# EAGLE board MJ808 clone - all driver (EAGLE 9.0.0)
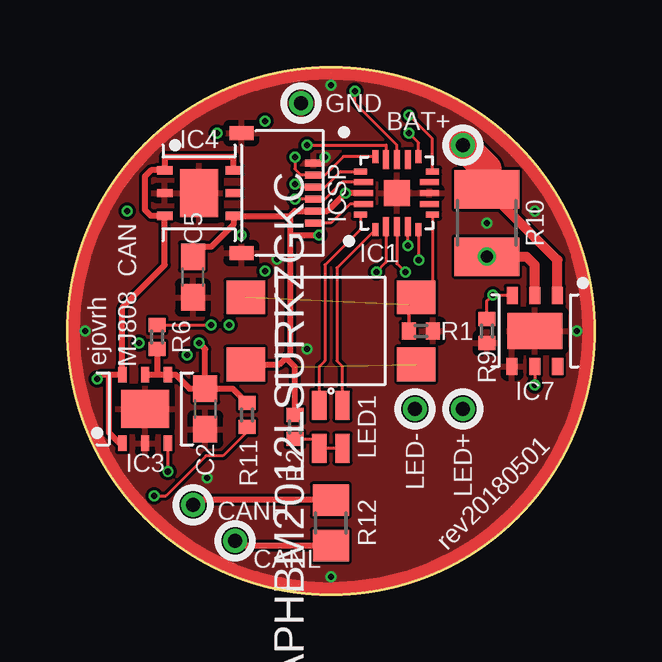
[diagram p0: board, top side]
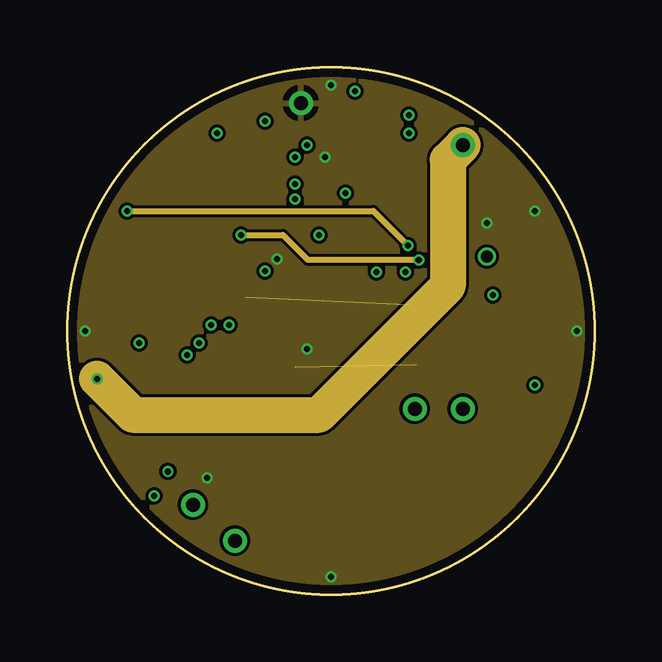
[diagram p1: board, inner layer Route2]
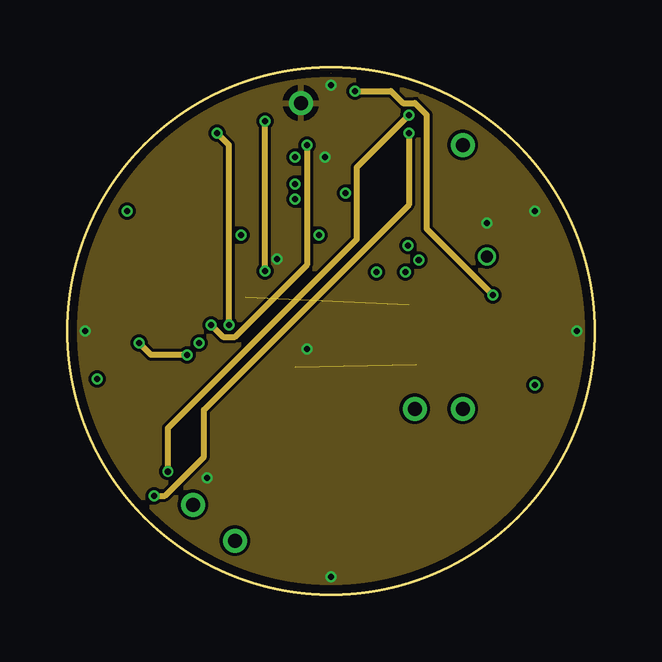
[diagram p2: board, inner layer Route15]
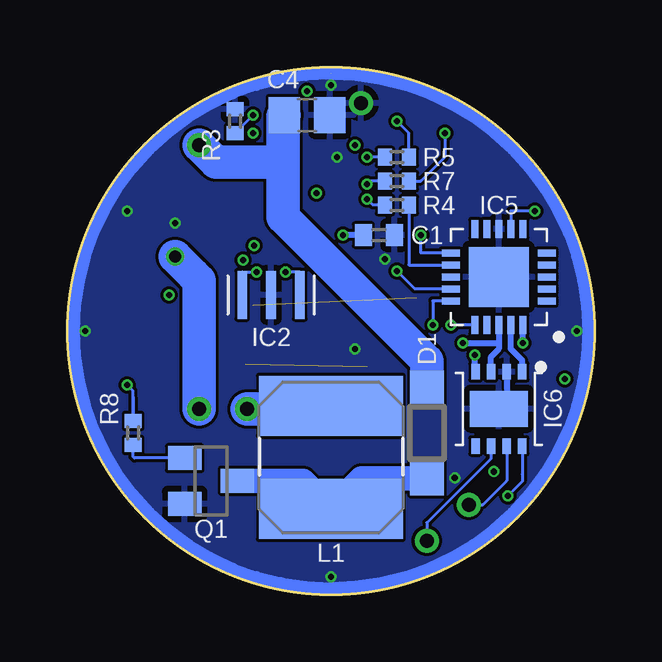
[diagram p3: board, bottom side, seen from below]

Size 22 x 22 mm. Coordinates in mm from the lower left corner, seen from the top.
Outline: circle at 11,11 radius 11
Copper layers (1*2*15*16): Top 0.035559375mm / dielectric 0.17018125mm / Route2 0.01778125mm / dielectric 47mil / Route15 0.01778125mm / dielectric 0.17018125mm / Bottom 0.035559375mm
Design rules "oshpark-4layer *": minimum track width 5mil, minimum drill 10mil, track to track 5mil, track to pad 5mil, pad to pad 5mil, via to via 5mil, smd to smd 5mil, copper to edge 15mil, drill to drill 6mil, minimum pad ring 4mil, minimum via ring 4mil, stop-mask expansion 2.5mil, vias tented up to drill 0mil, thermal gap 10mil
Net classes: 0 GND: width 0.254 mm, drill 0.254 mm, clearance 0.127 mm; 1 VCC: width 0.254 mm, drill 0.254 mm, clearance 0.127 mm; 2 signal: width 0.127 mm, drill 0.254 mm, clearance 0.127 mm
tRestrict: area 18,10.2 to 18.2,11.8
bRestrict: area 3,6.6 to 5,6.9

## Footprints (pad centres in the part's own frame; a part is rotated, then mirrored left to right if it is on the bottom)
TH = drill 0.6 pad 1.016: TP$1 0,0
C0402 = smd 0.7 x 0.9: 1 -0.65,0; 2 0.65,0
C0603 = smd 1.1 x 1: 1 -0.85,0; 2 0.85,0
C0805 = smd 1.3 x 1.5: 1 -0.95,0; 2 0.95,0
SOD123 = smd 1.4 x 1.4: A 1.9,0; C -1.9,0
VQFN-20 = smd 1.1 x 1.1: GND 0,0 | smd 0.25 x 0.8: GND1 0,-1.35; PA2 -0.45,1.4; PB7 0.45,1.4; PD5 -0.45,-1.35; PD6 0.45,-1.35; VCC 0,1.4 | smd 0.8 x 0.25: PA0 -1.4,0; PA1 -1.4,0.45; PB2 1.4,-0.45; PB3 1.4,0; PB4 1.4,0.45; PD2 -1.4,-0.45 | smd 0.25 x 0.55: PB0 0.9,-1.48; PB6 0.9,1.52; PD0 -0.9,1.52; PD4 -0.9,-1.48 | smd 0.55 x 0.25: PB1 1.52,-0.9; PB5 1.52,0.9; PD1 -1.52,0.9; PD3 -1.52,-0.9
SMT = smd 0.4 x 2: GND 0,0; XTAL1 -1.2,0; XTAL2 1.2,0
WSON6 = smd 0.35 x 0.65: 1-IN -0.95,-1.431; 2-GND 0,-1.431; 3-EN 0.95,-1.431; 4-OUT 0.954,1.431; 5-SNS 0,1.431; 6-IN -0.954,1.431 | smd 2 x 1.6: GND1 0,0
QFN20 = smd 0.3 x 0.75: !CS! 1,2; !RESET! 0.5,2; !RX0BF! 1,-2; !RX1BF! 0.5,-2; GND6 0,-2; OSC1 -0.5,-2; OSC2 -1,-2; RXCAN -1,2; TXCAN -0.5,2; VDD 0,2 | smd 0.75 x 0.3: !INT! 2,-1; !TX0RTS! -2,0.5; !TX1RTS! -2,0; !TX2RTS! -2,-1; CLKOUT -2,1; NC1 -2,-0.5; NC2 2,0; SCK 2,-0.5; SI 2,0.5; SO 2,1 | smd 2.5 x 2.5: GND 0,0
DFN10 = smd 0.35 x 0.65: CANH -0.325,1.55; CANL 0.325,1.55; RXD 0.975,-1.55; SPLIT 0.975,1.55; STBY -0.975,1.55; TXD -0.975,-1.55; VDD 0.325,-1.55; VSS -0.325,-1.55 | smd 2.4 x 1.5: GND 0,0
TDFN-6-EP = smd 0.71 x 0.46: CSN -1.48,0; DIM -1.48,-0.94; DRV 1.48,0; GND1 1.48,-0.95; IN -1.48,0.94; VCC 1.48,0.95 | smd 1.5 x 2.3: GND 0,0
SMT' = smd 0.3 x 0.7: 1 -1.25,1.27; 2 -0.75,1.27; 3 -0.25,1.27; 4 0.25,1.27; 5 0.75,1.27; 6 1.25,1.27 | smd 0.6 x 1: GND1 -2.5,-1.73; GND2 2.5,-1.73
SRN6045 = smd 2.5 x 6: 1 -2.175,0; 2 2.125,0
SMD = smd 1.2 x 0.6: 1 0.9,0.48; 2 -0.9,0.48; 3 -0.9,-0.48; 4 0.9,-0.48
SOT23 = smd 1 x 1.4: 1 -0.95,-1.1; 2 0.95,-1.1; 3 0,1.1
R0402 = smd 0.6 x 0.7: 1 -0.5,0; 2 0.5,0
R1210 = smd 1.6 x 2.7: 1 -1.4,0; 2 1.4,0
R0805 = smd 1.3 x 1.5: 1 -0.95,0; 2 0.95,0
SMD' = smd 1.6 x 1.4: 1 -3.556,-1.397; 2 3.556,-1.397; 3 -3.556,1.397; 4 3.556,1.397

## Placement (x,y rotation side)
BAT+  LiIon + Terminal  [TH]  16.5,18.75 0 top
C1  0.1μF  [C0402]  9,15 0 bottom
C2  22μF  [C0603]  5.75,7.75 270 top
C4  47μF / 15V+  [C0805]  12,20 0 bottom
C5  22μF  [C0603]  5.25,13.25 90 top
CANH  CAN high  [TH]  5.25,3.75 0 top
CANL  CAN low  [TH]  7,2.25 0 top
D1  PMEG2010ER,115  [SOD123]  7,6.75 270 bottom
GND  LiIon - Terminal  [TH]  9.75,20.5 0 top
IC1  ATTINY4313-MMH  [VQFN-20]  13.75,16.75 90 top
IC2  PRQV8.00CR1510Y00L  [SMT]  13.5,12.5 0 bottom
IC3  LP38693SD-5.0/NOPB  [WSON6]  3.25,7.75 0 top
IC4  LP38693SD-5.0/NOPB  [WSON6]  5.5,16.75 270 top
IC5  MCP2515  [QFN20]  4,13.25 180 bottom
IC6  MCP2561-2  [DFN10]  4,7.75 180 bottom
IC7  MAX16820  [TDFN-6-EP]  19.5,11 270 top
ICSP  5034800600  [SMT']  9,16.75 270 top
L1  VLS6045EX-150M-CA  [SRN6045]  11,5.75 90 bottom
LED1  APHBM2012LSURKZGKC  [SMD]  11,7 270 top
LED+  LED anode  [TH]  16.5,7.75 0 top
LED-  LED cathode  [TH]  14.5,7.75 0 top
Q1  PMV213SN,215  [SOT23]  16,4.75 270 bottom
R1  10k  [R0402]  14.75,11 0 top
R2  10k  [R0402]  9.5,7 90 top
R3  10k  [R0402]  15,19.75 270 bottom
R4  330  [R0402]  8.25,16.25 180 bottom
R5  330  [R0402]  8.25,18.25 180 bottom
R6  10k  [R0402]  3.75,10.75 90 top
R7  330  [R0402]  8.25,17.25 180 bottom
R8  10k  [R0402]  19.25,6.75 270 bottom
R9  10k  [R0402]  17.5,11 270 top
R10  0.15 / 1W  [R1210]  17.5,15.5 90 top
R11  10k  [R0402]  7.5,7.5 270 top
R12  120  [R0805]  11,3 90 top
SW1  TL3305-844809  [SMD']  11,11 0 top

## Library data of the parts
BAT+ CANH CANL GND LED+ LED- = signal testpoint
C1 C2 C4 C5 = rcl; SPICEPREFIX: C
D1 = diode
IC1 = ATtiny4313 microcontroller; SPICEPREFIX: X
IC2 = PRQV8.00CR1510Y00L - 8MHz resonator
IC3 IC4 = LP38693 5V LDO
IC5 = MCP2515-I-ML - Standalonce CAN Controller with SPI Interface
IC6 = MCP2561-2 - High-Speed CAN Transceiver
IC7 = MAX16820 LED Driver, constant current
ICSP = 5034800600 FPC Connector
L1 = SparkFun-Coils; PROD_ID: NDUC-11627
LED1 = APHBM2012LSURKZGKC
Q1 = adafruit
R1-R12 = rcl; SPICEPREFIX: R
SW1 = TL3305-844809 SPST-NO Tact Switch

## Nets
5V0_CAN: C2.1 IC3.4-OUT IC3.5-SNS IC5.VDD IC6.VDD R6.1 R11.1
5V0_μC [VCC]: C1.1 C5.2 IC1.VCC IC4.4-OUT ICSP.5 R2.2 SW1.1 SW1.2
BAT+: BAT+.TP$1 C4.1 D1.C IC3.1-IN IC3.6-IN IC4.1-IN IC4.3-EN IC4.6-IN IC7.IN R10.2
CANH [signal]: CANH.TP$1 IC6.CANH R12.2
CANL [signal]: CANL.TP$1 IC6.CANL R12.1
CLOCKOUT [signal]: IC1.PD2 IC5.OSC1
DEBUGWIRE/RESET [signal]: IC1.PA2 ICSP.6
DIM_BRAKE_DRAIN: D1.A L1.1 Q1.3
DIM_FRONT [signal]: IC1.PB3 IC7.DIM R9.1
DIM_FRONT_GATE [signal]: IC7.DRV R8.1
EN [signal]: IC1.PB0 IC3.3-EN R3.2
GATE [signal]: Q1.1 R8.2
GND: C1.2 C2.2 C4.2 C5.1 GND.TP$1 IC1.GND IC1.GND1 IC2.GND IC3.2-GND IC3.GND1 IC4.2-GND IC4.GND1 IC5.GND IC5.GND6 IC6.GND IC6.VSS IC7.GND IC7.GND1 ICSP.1 ICSP.GND1 ICSP.GND2 Q1.2 R1.2 R3.1 R9.2
GREEN_LED [signal]: IC1.PD0 LED1.3
ICSP_MISO [signal]: IC1.PB6 ICSP.3 R7.2
ICSP_MOSI [signal]: IC1.PB5 ICSP.2 R5.2
ICSP_SCK [signal]: IC1.PB7 ICSP.4 R4.2
INT [signal]: IC1.PD3 IC5.!INT!
LED [signal]: LED1.1 LED1.4 R2.1
LED_AN: IC7.CSN LED+.TP$1 R10.1
LED_CA: L1.2 LED-.TP$1
N$1: IC1.PD6
N$2: IC1.PD5
N$3: IC1.PB2
RED_LED [signal]: IC1.PD1 LED1.2
RXCAN: IC5.RXCAN IC6.RXD
SPI_MISO [signal]: IC5.SO R7.1
SPI_MOSI [signal]: IC5.SI R5.1
SPI_SCK [signal]: IC5.SCK R4.1
SPI_SS [signal]: IC1.PB4 IC5.!CS! R6.2
STBY [signal]: IC1.PB1 IC6.STBY R11.2
SWITCH [signal]: IC1.PD4 R1.1 SW1.3 SW1.4
TXCAN: IC5.TXCAN IC6.TXD
VCC: IC7.VCC
XTAL1 [signal]: IC1.PA0 IC2.XTAL1
XTAL2 [signal]: IC1.PA1 IC2.XTAL2

## Tracks (layer width: path | path; a pad name or v marks a point on that pad's centre or on a via)
5V0_CAN  (via drill 0.25)
  Top 0.254: IC3.5-SNS 3.75,9.18 | 3.75,9.18 IC3.4-OUT 4.52,9.18 5.1,8.6 C2.1 | v5.5,10.5 v5.5,10.49 5.75,10.24 C2.1 | R6.1 3.75,9.18 | 6.1,8.25 C2.1 | C2.1 6.9,8.6 R11.1
  Bottom 0.254: IC5.VDD 4,10.5 | 4,10.5 4,10.25 4.33,9.93 IC6.VDD | v5.5,10.5 4,10.5
5V0_μC  (via drill 0.25)  (1 unrouted)
  Top 0.254: IC1.VCC v11.6,16.75 10.85,16 ICSP.5 9.5,16 9.3,15.8 | 9.3,15.8 IC4.4-OUT 6.93,15.43 6,14.5 5.65,14.5 C5.2 | SW1.1 8.85,9.6 9.12,9.88 | 9.3,15.8 9.3,15 | 9.3,15 9.3,10.05 9.12,9.88 | 9.3,15 v10.5,15 | R2.2 9.5,9.5 9.12,9.88
  Bottom 0.254: C1.1 v10.5,15
BAT+  (via drill 0.25)
  Top 0.254: IC4.6-IN 6.93,18.25 4.07,18.25 IC4.1-IN 3.5,17.7 3.25,17.45 3.25,16.05 3.5,15.8 IC4.3-EN 4.07,13.75 2.3,11.98 IC3.6-IN | 1.75,9.18 1.75,6.75 2.18,6.32 IC3.1-IN | IC3.6-IN 2.18,9.18 | v1.25,9 1.43,9.18 1.75,9.18 | 1.75,9.18 IC3.6-IN
  Top 0.406: R10.2 20.44,13.96 IC7.IN
  Top 1.25: R10.2 17.5,17.75 BAT+.TP$1
  Route2 1.5: BAT+.TP$1 15.88,18.12 15.88,12.88 10.5,7.5 2.75,7.5 v1.25,9
  Bottom 1.4: BAT+.TP$1 15.8,18.05 14.25,18.05 13.2,18.05 13,18.25 | D1.C 7,9.75 13,15.75 13,18.25 | 13,18.25 13,19.95 C4.1
CANH
  Top 0.254: R12.2 5.45,3.95 CANH.TP$1
  Bottom 0.127: IC6.CANH 3.67,4.75 4.67,3.75 CANH.TP$1
CANL
  Top 0.254: 10.8,2.25 R12.1 7.2,2.05 CANL.TP$1
  Bottom 0.127: IC6.CANL 4.33,5.67 7,3 CANL.TP$1
CLOCKOUT  (via drill 0.25)
  Top 0.127: IC1.PD2 14.2,15.25 v14.2,14.56
  Route2 0.254: v14.2,14.56 12.76,16 v2.5,16
  Bottom 0.127: v2.5,16 3.5,16 IC5.OSC1
DEBUGWIRE/RESET
  Top 0.127: IC1.PA2 11.8,16.3 11,15.5 ICSP.6
DIM_BRAKE_DRAIN
  Bottom 1.016: 7.1,4.75 D1.A 9.72,4.85 L1.1 12.18,4.75 Q1.3
DIM_FRONT  (via drill 0.25)
  Top 0.127: 18.5,12.75 18.5,12.54 IC7.DIM 18.54,12.5 v17.75,12.5 17.5,12.25 R9.1 | IC1.PB3 13.75,18.75 12,20.5 v12,21
  Route15 0.254: v17.75,12.5 15,15.25 15,20 14.5,20.5 14,20.5 13.5,21 v12,21
DIM_FRONT_GATE  (via drill 0.25)
  Top 0.127: IC7.DRV v19.5,8.75
  Bottom 0.127: 19.25,8.25 R8.1 19.25,8.5 v19.5,8.75
EN  (via drill 0.25)
  Top 0.127: v4.2,5.13 IC3.3-EN | IC1.PB0 15.23,19.02 v14.25,20
  Route15 0.254: v4.2,5.13 4.2,6.95 12.07,14.82 12.07,17.82 v14.25,20
  Bottom 0.127: R3.2 v14.25,20
GATE
  Bottom 0.127: Q1.1 19.2,5.7 19.25,5.75 R8.2
GND  (via drill 0.25)  (1 unrouted)
  Top 0.127: v11,21.25 11,21.75 | v11,0.75 11,0.25
  Top 0.254: ICSP.1 10.5,18 v10.75,18.25
  Top 0.55: 11,21.75 arc-180 11,0.25 arc-180 11,21.75
  Bottom 0.254: IC6.GND 3.67,8.07 IC6.VSS
  Bottom 0.55: 11,21.75 arc180 11,0.25 arc180 11,21.75
  other vias: 8.75,14 0.75,11 10,10.25 5.84,4.88 19.5,16 17.5,15.5 21.25,11
  pour Top: -1,23 23,23 23,-1 -1,-1
  pour Bottom: -1,23 23,23 23,-1 -1,-1
  pour Route15: -1,23 23,23 23,-1 -1,-1
  pour Route2: -1,23 23,23 23,-1 -1,-1
GREEN_LED
  Top 0.127: IC1.PD0 12.23,15.23 10.75,13.75 10.75,9.75 10.52,9.52 LED1.3
ICSP_MISO  (via drill 0.25)
  Top 0.127: IC1.PB6 11.4,17.65 10.75,17 ICSP.3 9.62,17 v9.5,17.12
  Bottom 0.127: R7.2 9.38,17.25 v9.5,17.12
ICSP_MOSI  (via drill 0.25)
  Top 0.127: IC1.PB5 11.52,18.27 10.75,17.5 ICSP.2 | ICSP.2 10.25,17.5 | v9.5,18.25 9.5,17.75 9.75,17.5 ICSP.2
  Bottom 0.127: R5.2 v9.5,18.25
ICSP_SCK  (via drill 0.25)
  Top 0.127: IC1.PB7 11.45,17.2 10.75,16.5 ICSP.4 v9.5,16.5
  Bottom 0.127: R4.2 9.25,16.25 v9.5,16.5
INT  (via drill 0.25)
  Top 0.127: IC1.PD3 v14.65,13.97 v14.66,13.96
  Route2 0.254: v7.25,15 9,15 10.04,13.96 v14.66,13.96
  Bottom 0.127: 6.75,14.25 IC5.!INT! 7.25,14.25 v7.25,15
LED
  Top 0.127: LED1.1 LED1.4 10.52,6.5 R2.1
LED_AN  (via drill 0.5)
  Top 0.406: R10.1 19.15,14.1 19.5,13.75 IC7.CSN
  Bottom 1.4: 16.75,13.35 R10.1 16.5,13.1 LED+.TP$1
  other vias: 17.5,14.1
LED_CA
  Bottom 1.4: LED-.TP$1 10.25,7.75 10.38,7.88 L1.2
RED_LED
  Top 0.127: IC1.PD1 11.25,13.63 11.25,9.75 11.48,9.52 LED1.2
RXCAN  (via drill 0.25)
  Route15 0.254: v5,10 3.5,10 v3,10.5
  Bottom 0.254: IC6.RXD 5,9.3 v5,10 | v3,10.5 IC5.RXCAN
SPI_MISO  (via drill 0.25)
  Route15 0.254: v6.75,11.25 6.75,18.75 v6.25,19.25
  Bottom 0.127: IC5.SO 6.75,12.25 v6.75,11.25 | v6.25,19.25 6.25,18.25 7.25,17.25 R7.1
SPI_MOSI  (via drill 0.25)
  Route15 0.254: v8.25,13.5 v8.25,19.75
  Bottom 0.127: IC5.SI 7.5,12.75 v8.25,13.5 | R5.1 7.75,19.25 v8.25,19.75
SPI_SCK
  Bottom 0.127: R4.1 7.75,13.75 IC5.SCK
SPI_SS  (via drill 0.25)
  Top 0.127: IC1.PB4 13.3,18.75 v10,18.75 | R6.2 v6,11.25
  Route15 0.254: v6,11.25 6.5,10.75 7,10.75 10,13.75 v10,18.75
  Bottom 0.127: IC5.!CS! v6,11.25
STBY  (via drill 0.25)
  Top 0.127: v3.62,4.12 4.12,4.12 5.79,5.79 6.5,5.79 7.5,6.79 R11.2 | IC1.PB1 14.65,18.85 v14.25,19.25
  Route15 0.254: v14.25,19.25 14.25,16.25 5.71,7.71 5.71,5.75 4.08,4.12 v3.62,4.12
  Bottom 0.127: 3.03,5.03 IC6.STBY 3.03,4.72 v3.62,4.12
SWITCH  (1 unrouted)
  Top 0.127: IC1.PD4 15.23,12.4 SW1.4
  Top 0.152: R1.1 14.25,12.09 SW1.4
TXCAN
  Bottom 0.254: IC6.TXD 3.03,9.78 3.5,10.25 IC5.TXCAN
XTAL1  (via drill 0.25)
  Top 0.127: IC1.PA0 13.75,13.81 v14.1,13.46
  Bottom 0.127: IC2.XTAL1 14.7,13.46 v14.1,13.46
XTAL2  (via drill 0.25)
  Top 0.127: IC1.PA1 13.3,13.87 v12.89,13.46
  Bottom 0.127: IC2.XTAL2 12.3,13.46 v12.89,13.46

## Text on the board
tPlace: MJ808 CAN | ejovrh | rev20180501